# EAGLE board hardhat (EAGLE 5.10)
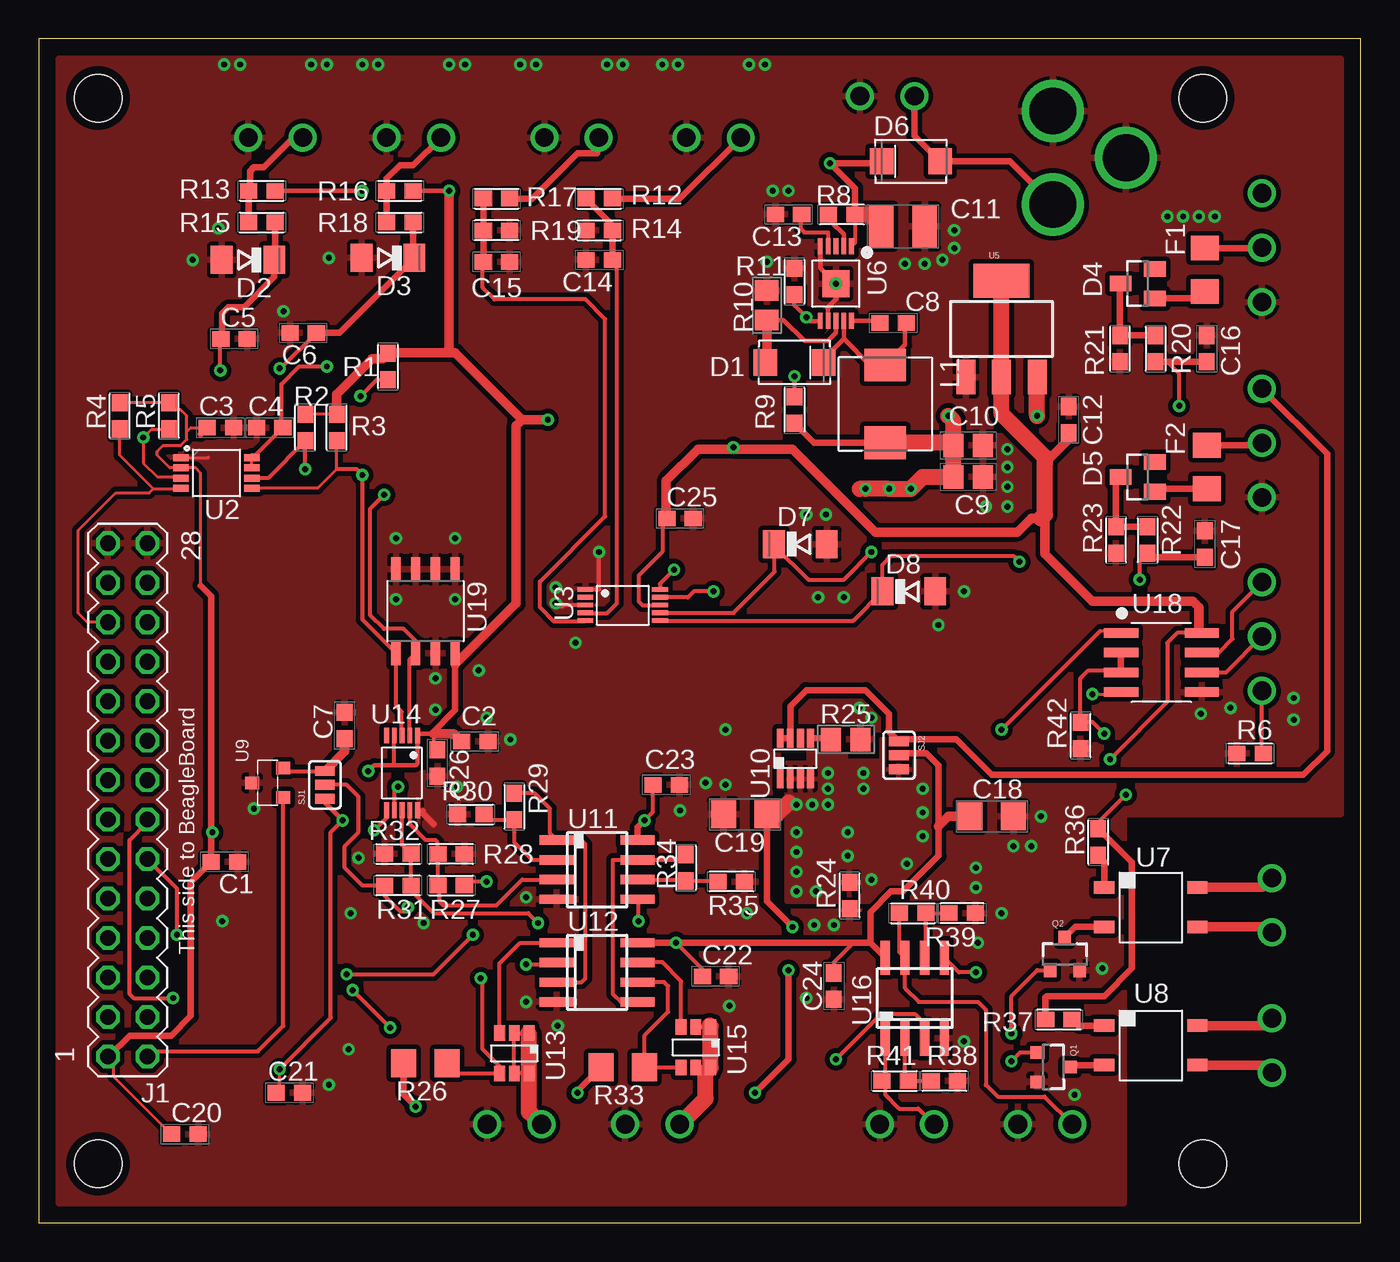
[diagram p0: board, top side]
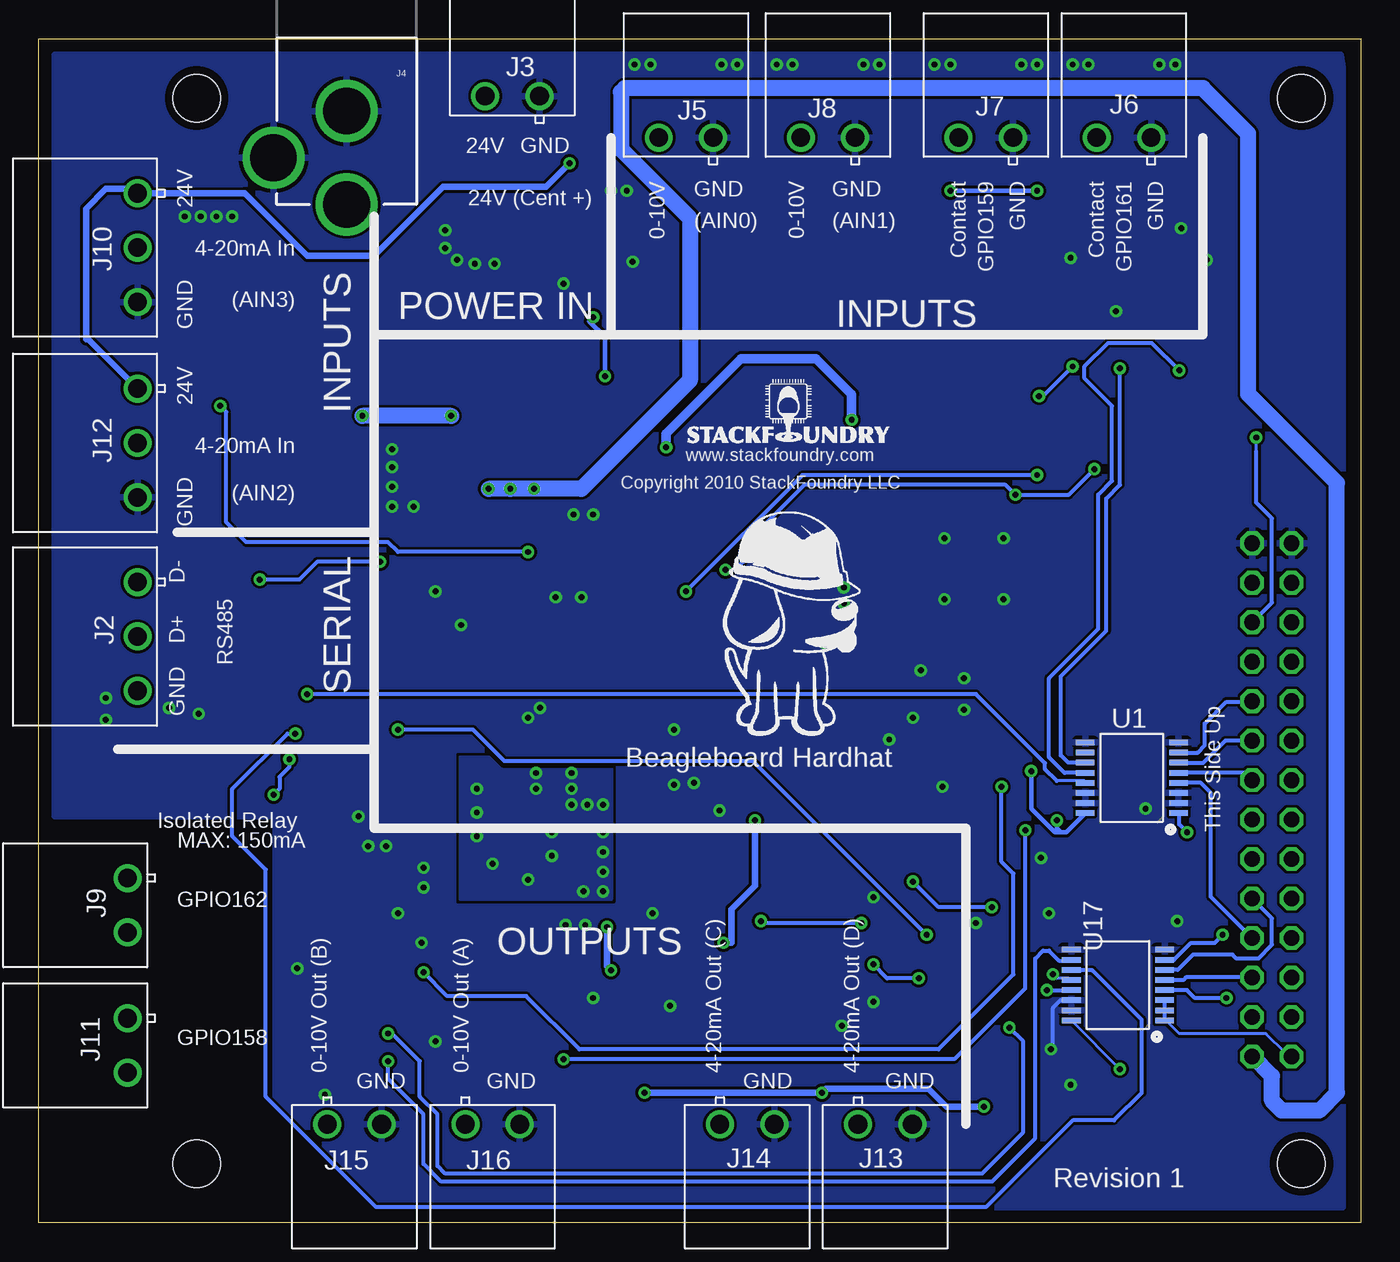
[diagram p1: board, bottom side, seen from below]

Size 85.09 x 76.2 mm. Coordinates in mm from the lower left corner, seen from the top.
Outline: 0,0 85.09,0 85.09,76.2 0,76.2 0,0
Copper layers (1*16): Top 0.0356mm / dielectric 1.5011mm / Bottom 0.0356mm
Design rules "PCB-Express_2layer *": minimum track width 8mil, minimum drill 15mil, track to track 7mil, track to pad 7mil, pad to pad 7mil, via to via 7mil, smd to smd 7mil, copper to edge 20mil, drill to drill 8mil, minimum pad ring 10mil, minimum via ring 8mil, stop-mask expansion 15mil, vias tented up to drill 15mil, thermal gap 10mil
Holes 3.05 mm at 3.81,3.81 3.81,72.39 74.93,72.39 74.93,3.81

## Footprints (pad centres in the part's own frame; a part is rotated, then mirrored left to right if it is on the bottom)
C0603 = smd 1.1 x 1: 1 -0.85,0; 2 0.85,0
C0805 = smd 1.3 x 1.5: 1 -0.95,0; 2 0.95,0
C1210 = smd 1.6 x 2.7: 1 -1.4,0; 2 1.4,0
C1206 = smd 1.6 x 1.8: 1 -1.4,0; 2 1.4,0
SMA = smd 1.524 x 1.676: A 1.88,0; C -1.88,0
SOD80C = smd 1.4 x 1.8: A 1.7,0; C -1.7,0
SOT23 = smd 1 x 1.4: 1 -0.95,-1.1; 2 0.95,-1.1; 3 0,1.1
R1206 = smd 1.6 x 1.8: 1 -1.4,0; 2 1.4,0
MA14-2M = drill 1.016 octagon: 1 -15.24,1.27; 2 -15.24,-1.27; 3 -12.7,1.27; 4 -12.7,-1.27; 5 -10.16,1.27; 6 -10.16,-1.27; 7 -7.62,1.27; 8 -7.62,-1.27; 9 -5.08,1.27; 10 -5.08,-1.27; 11 -2.54,1.27; 12 -2.54,-1.27; 13 0,1.27; 14 0,-1.27; 15 2.54,1.27; 16 2.54,-1.27; 17 5.08,1.27; 18 5.08,-1.27; 19 7.62,1.27; 20 7.62,-1.27; 21 10.16,1.27; 22 10.16,-1.27; 23 12.7,1.27; 24 12.7,-1.27; 25 15.24,1.27; 26 15.24,-1.27; 27 17.78,1.27; 28 17.78,-1.27
284512-3 = drill 1.2 round: 1 -1.75,0; 2 1.75,0; 3 5.25,0
284512-2 = drill 1.2 round: 1 -1.75,0; 2 1.75,0
POWER_JACK_PTH = drill 2.997 round: GND 0,7.7; GNDBREAK 4.7,10.7; PWR 0,13.7
ELL6 = smd 2.1 x 2.7: 1 -2.5,0; 2 2.5,0
SOT23-3 = smd 0.8 x 0.9: 1 -0.95,-1; 2 0.95,-1; 3 0,1.1
R0603 = smd 1.1 x 1: 1 -0.85,0; 2 0.85,0
R0805 = smd 1.3 x 1.5: 1 -0.95,0; 2 0.95,0
SJ_3 = smd 0.635 x 1.27: 1 -0.889,0; 2 0,0; 3 0.889,0
TSSOP16 = smd 0.35 x 1.2: 1 -1.95,-3; 2 -1.3,-3; 3 -0.65,-3; 4 0,-3; 5 0.65,-3; 6 1.3,-3; 7 1.95,-3; 8 2.6,-3; 9 2.6,3; 10 1.95,3; 11 1.3,3; 12 0.65,3; 13 0,3; 14 -0.65,3; 15 -1.3,3; 16 -1.95,3
TSSOP-8 = smd 1 x 0.45: 1 -2.275,0.975; 2 -2.275,0.325; 3 -2.275,-0.325; 4 -2.275,-0.975; 5 2.275,-0.975; 6 2.275,-0.325; 7 2.275,0.325; 8 2.275,0.975
MSOP10 = smd 0.3 x 1.016: 1 0,0; 2 0.5,0; 3 1.001,0; 4 1.501,0; 5 2.002,0; 6 2.002,4.801; 7 1.501,4.801; 8 1.001,4.801; 9 0.5,4.801; 10 0,4.801
SOT223 = smd 1.219 x 2.235: 1 -2.311,-3.099; 2 0,-3.099; 3 2.311,-3.099 | smd 3.6 x 2.2: 4 0,3.099
MSSOP-10 = smd 0.3 x 1.02: 1 -1,-2.4; 2 -0.5,-2.4; 3 0,-2.4; 4 0.5,-2.4; 5 1,-2.4; 6 1,2.4; 7 0.5,2.4; 8 0,2.4; 9 -0.5,2.4; 10 -1,2.4 | smd 1.73 x 1.73: P$1 0,0
SOP4 = smd 0.8 x 1.3: 1 -2.54,0; 2 0,0; 3 0,6; 4 -2.54,6
SOT23' = smd 0.8 x 0.9: 1 -0.95,-1; 2 0.95,-1; 3 0,1
TS8 = smd 0.44 x 1.22: 1 -1.3,0; 2 -0.65,0; 3 0,0; 4 0.65,0; 5 0.65,2.62; 6 0,2.62; 7 -0.65,2.62; 8 -1.3,2.62
SO08 = smd 0.6 x 2.2: 1 -1.905,-2.6; 2 -0.635,-2.6; 3 0.635,-2.6; 4 1.905,-2.6; 5 1.905,2.6; 6 0.635,2.6; 7 -0.635,2.6; 8 -1.905,2.6
SSOT-6 = smd 0.7 x 1: 1 -0.95,-1.3; 2 0,-1.3; 3 0.95,-1.3; 4 0.95,1.3; 5 0,1.3; 6 -0.95,1.3
SO-08 = smd 0.6 x 2.2: 1 -1.905,-2.6; 2 -0.635,-2.6; 3 0.635,-2.6; 4 1.905,-2.6; 5 1.905,2.6; 6 0.635,2.6; 7 -0.635,2.6; 8 -1.905,2.6
SO-08' = smd 0.6 x 1.55: 1 -1.905,-2.7; 2 -0.635,-2.7; 3 0.635,-2.7; 4 1.905,-2.7; 5 1.905,2.7; 6 0.635,2.7; 7 -0.635,2.7; 8 -1.905,2.7

## Placement (x,y rotation side)
C1  0.1uF  [C0603]  11.94,23.24 0 top
C2  0.1uF  [C0603]  28.07,30.99 0 top
C3  0.1uF  [C0603]  11.68,51.18 0 top
C4  0.1uF  [C0603]  14.86,51.18 180 top
C5  0.01uF  [C0603]  12.57,56.9 0 top
C6  0.01uF  [C0603]  17.02,57.28 180 top
C7  0.1uF  [C0603]  19.68,32 90 top
C8  0.1 uF  [C0603]  54.99,57.91 0 top
C9  4.7 uF  [C0805]  59.82,48.01 0 top
C10  4.7 uF  [C0805]  59.82,50.04 0 top
C11  10 uF, 50V  [C1210]  55.63,64.14 0 top
C12  1uF  [C0603]  66.29,51.69 270 top
C13  0.01 uF  [C0603]  48.26,64.9 180 top
C14  0.01uF  [C0603]  36.07,61.98 180 top
C15  0.01uF  [C0603]  29.46,61.85 0 top
C16  0.01uF  [C0603]  75.18,56.26 90 top
C17  0.01uF  [C0603]  75.06,43.69 90 top
C18  4.7uF  [C1206]  61.34,26.16 0 top
C19  4.7uF  [C1206]  45.47,26.29 180 top
C20  0.1uF  [C0603]  9.4,5.71 0 top
C21  0.1uF  [C0603]  16.13,8.38 0 top
C22  0.01uF  [C0603]  43.56,15.88 0 top
C23  0.01uF  [C0603]  40.39,28.19 0 top
C24  0.01uF  [C0603]  51.18,15.24 270 top
C25  0.01uF  [C0603]  41.27,45.34 0 top
C26  0.01uF  [C0603]  25.65,29.59 270 top
D1  B360A  [SMA]  48.64,55.37 180 top
D2  3.3V  [SOD80C]  13.46,61.98 180 top
D3  3.3V  [SOD80C]  22.48,62.1 180 top
D4  BAT754  [SOT23]  70.74,60.45 90 top
D5  BAT754  [SOT23]  70.74,48.01 90 top
D6  B360A  [SMA]  56.13,68.33 0 top
D7  3.3V  [SOD80C]  49.02,43.69 0 top
D8  3.3V  [SOD80C]  56.01,40.64 0 top
F1  [R1206]  75.06,61.34 90 top
F2  [R1206]  75.18,48.64 90 top
J1  [MA14-2M]  5.71,25.96 90 top
J2  284512-3  [284512-3]  78.74,39.5 270 bottom
J3  284512-2  [284512-2]  54.61,72.52 180 bottom
J4  POWER_JACKPTH  [POWER_JACK_PTH]  65.28,79.25 180 bottom
J5  284512-2  [284512-2]  43.43,69.85 180 bottom
J6  284512-2  [284512-2]  15.24,69.85 180 bottom
J7  284512-2  [284512-2]  24.13,69.85 180 bottom
J8  284512-2  [284512-2]  34.29,69.85 180 bottom
J9  284512-2  [284512-2]  79.38,20.45 270 bottom
J10  284512-3  [284512-3]  78.74,64.52 270 bottom
J11  284512-2  [284512-2]  79.38,11.43 270 bottom
J12  284512-3  [284512-3]  78.74,51.94 270 bottom
J13  284512-2  [284512-2]  30.61,6.35 0 bottom
J14  284512-2  [284512-2]  39.5,6.35 0 bottom
J15  284512-2  [284512-2]  64.77,6.35 0 bottom
J16  284512-2  [284512-2]  55.88,6.35 0 bottom
L1  22 uH  [ELL6]  54.48,52.7 270 top
LOGO1  SFLOGO  [SFLOGO]  43.31,50.19 0 bottom
Q1  2n7002  [SOT23-3]  65.28,10.03 270 top
Q2  2n7002  [SOT23-3]  66.04,17.27 0 top
R1  200k  [R0603]  22.48,55.12 90 top
R2  10k  [R0603]  17.14,51.18 90 top
R3  10k  [R0603]  19.18,51.18 90 top
R4  10k  [R0603]  5.21,51.94 90 top
R5  10k  [R0603]  8.38,51.94 90 top
R6  100  [R0603]  77.98,30.23 0 top
R8  110k  [R0603]  51.69,64.9 180 top
R9  9.76k  [R0603]  48.64,52.32 270 top
R10  0.2  [R0805]  46.86,59.05 270 top
R11  10k  [R0603]  48.64,60.58 270 top
R12  40.2k  [R0603]  36.07,65.91 0 top
R13  10k  [R0603]  14.35,66.42 0 top
R14  10k  [R0603]  36.07,63.88 0 top
R15  10k  [R0603]  14.35,64.39 0 top
R16  10k  [R0603]  23.24,66.42 0 top
R17  40.2k  [R0603]  29.46,65.91 0 top
R18  10k  [R0603]  23.24,64.39 0 top
R19  10k  [R0603]  29.46,63.88 180 top
R20  47k  [R0603]  71.88,56.26 270 top
R21  100  [R0603]  69.6,56.26 90 top
R22  47k  [R0603]  71.37,43.94 270 top
R23  100  [R0603]  69.34,43.94 90 top
R24  10k  [R0603]  52.2,21.08 90 top
R25  1.91M  [R0805]  51.94,31.11 180 top
R26  300 0.1%  [R1206]  24.89,10.29 180 top
R27  6.65k  [R0603]  26.54,21.72 0 top
R28  10k  [R0603]  26.54,23.75 180 top
R29  54.9k  [R0603]  30.61,26.8 270 top
R30  10k  [R0603]  27.81,26.29 0 top
R31  6.65k  [R0603]  23.11,21.72 180 top
R32  10k  [R0603]  23.11,23.75 0 top
R33  300 0.1%  [R1206]  37.59,10.03 180 top
R34  54.9k  [R0603]  41.66,22.86 270 top
R35  10k  [R0603]  44.58,21.97 180 top
R36  220  [R0603]  68.2,24.51 90 top
R37  220  [R0603]  65.66,13.08 180 top
R38  10k  [R0603]  58.29,9.14 180 top
R39  10k  [R0603]  59.44,19.94 180 top
R40  40.2k  [R0603]  56.26,19.94 0 top
R41  40.2k  [R0603]  55.12,9.14 0 top
R42  10k  [R0603]  67.06,31.37 90 top
SJ1  [SJ_3]  18.41,28.19 90 top
SJ2  [SJ_3]  55.37,30.1 270 top
U1  SN74AVC4T245PW  [TSSOP16]  14.73,28.32 90 bottom
U2  GTL2002TSSOP8  [TSSOP-8]  11.43,48.26 0 top
U3  ADS1015  [MSOP10]  35.18,40.77 270 top
U5  [SOT223]  61.98,57.53 0 top
U6  LM25011  [MSSOP-10]  51.31,60.45 180 top
U7  TLP176D  [SOP4]  68.58,19.05 270 top
U8  TLP176D  [SOP4]  68.58,10.16 270 top
U9  REF3333  [SOT23']  14.73,28.32 90 top
U10  LT3082TS8  [TS8]  49.02,28.57 0 top
U11  LT1678  [SO08]  35.94,22.73 270 top
U12  OPA2141  [SO08]  35.94,16.13 270 top
U13  FDC5614P  [SSOT-6]  30.61,10.92 180 top
U14  MCP4728  [MSOP10]  24.38,31.37 180 top
U15  FDC5614P  [SSOT-6]  42.29,11.3 180 top
U16  LT1678  [SO08]  56.39,14.48 0 top
U17  SN74AVC4T245PW  [TSSOP16]  15.62,14.99 90 bottom
U18  SN65HVD11SO-08  [SO-08]  72.26,36.07 270 top
U19  24C01SN  [SO-08']  24.89,39.37 180 top
U$1  BEAGLE_HARDHAT  [BEAGLE_HARDHAT]  44.83,31.37 0 bottom

## Library data of the parts
C1-C26 F1 F2 L1 R1-R6 R8-R42 = rcl
D1-D8 = diode
J1 = con-lstb
J2 J3 J5-J16 = con-tyco
J4 Q1 Q2 SJ1 SJ2 U5 = SparkFun
LOGO1 U$1 = logos
U1 U3 U17 U18 = texas
U2 = nxp
U6 = national-semiconductor
U7 U8 = toshiba
U9 = analog-devices
U10 = linear-technology
U11 U12 U16 = linear
U13 U15 = fairchild-semic
U14 U19 = microchip

## Nets
10V_1: C14.1 R12.1 R14.2 U3.4
10V_2: C15.1 R17.1 R19.2 U3.5
20MA_1: C16.1 D7.C R20.2 U3.7
20MA_2: C17.1 D8.C R22.2 U3.6
+1V8: C1.1 C3.1 C20.1 J1.1 R4.2 R5.2 U1.1 U2.2 U17.1 U17.2 U17.3
+3V3: C2.1 C12.2 C21.1 C25.1 C26.1 R1.2 R2.2 R3.2 R13.2 R16.2 R36.2 R37.2 SJ1.1 U1.16 U3.8 U5.2 U5.4 U14.1 U14.4 U17.16 U18.8 U19.8
+5V: C9.1 C10.1 J1.2 L1.2 R9.2 U5.3 U9.1
+18V: C19.1 R24.2 R26.2 R33.2 SJ2.3 U10.2 U10.3 U10.4
+24V: C11.1 D6.C J10.1 J12.1 R8.1 SJ2.1 U6.1 U10.7 U10.8
BB_!RESET: J1.26
BB_GPIO_133: J1.15
BB_GPIO_136: J1.9
BB_GPIO_137: J1.7
BB_GPIO_138: J1.5
BB_GPIO_139: J1.3
BB_GPIO_143/U2RX: J1.8 U1.4
BB_GPIO_144/U2CTS: J1.4
BB_GPIO_145/U2RTS: J1.10 U17.6
BB_GPIO_146/U2TX: J1.6 U17.5
BB_GPIO_156: J1.20 U1.7
BB_GPIO_158: J1.12 U17.7
BB_GPIO_159: J1.18 U1.6
BB_GPIO_161: J1.16 U1.5
BB_GPIO_162: J1.14 U17.4
BB_SCL: J1.24 R5.1 U2.3
BB_SDA: J1.23 R4.1 U2.4
BB_SPI3_!CS0: J1.11
BB_SPI3_!CS1: J1.13
BB_SPI3_CLK: J1.21
BB_SPI3_MISO: J1.17
BB_SPI3_MOSI: J1.19
CONT1: C5.1 D2.C R15.2 U1.12
CONT2: C6.1 D3.C R18.2 U1.11
COUT1: Q2.1 U17.13
COUT2: Q1.1 U17.10
DACRDY: U14.5
GND: C1.2 C2.2 C3.2 C4.2 C5.2 C6.2 C7.2 C9.2 C10.2 C11.2 C12.1 C13.2 C14.2 C15.2 C16.2 C17.2 C18.2 C19.2 C20.2 C21.2 C22.2 C23.2 C24.2 C25.2 C26.2 D2.A D3.A D7.A D8.A J1.27 J1.28 J3.1 J4.GND J4.GNDBREAK J5.1 J6.1 J7.1 J8.1 J10.3 J12.3 J13.2 J14.2 J15.2 J16.2 Q1.2 Q2.2 R6.1 R10.1 R11.1 R14.1 R19.1 R21.1 R23.1 R24.1 R25.1 R28.1 R30.1 R32.1 R35.1 R38.1 R39.1 R42.1 U1.2 U1.3 U1.8 U1.9 U1.14 U1.15 U2.1 U3.1 U3.3 U5.1 U6.5 U6.7 U6.P$1 U9.3 U11.4 U12.4 U14.10 U16.4 U17.8 U17.9 U17.14 U17.15 U18.5 U19.1 U19.2 U19.3 U19.4 U19.7
N$1: J9.2 U7.3
N$3: J6.2 R13.1 R15.1
N$4: J9.1 U7.4
N$5: J11.2 U8.3
N$6: J7.2 R16.1 R18.1
N$7: J11.1 U8.4
N$8: J2.1 U18.7
N$9: J5.2 R12.2
N$10: J8.2 R17.2
N$11: D6.A J3.2 J4.PWR
N$12: J2.3 R6.2
N$16: R27.1 R28.2 U11.3 U14.9
N$17: C4.1 R1.1 U2.7 U2.8
N$18: R31.1 R32.2 U11.5 U14.8
N$19: R29.2 R30.2 U11.2
N$20: R29.1 U11.1 U12.3
N$21: R34.1 U11.7 U12.5
N$22: R34.2 R35.2 U11.6
N$23: R25.2 U10.5
N$24: U12.1 U13.3
N$25: U12.7 U15.3
N$26: R33.1 U12.6 U15.4
N$27: R26.1 U12.2 U13.4
N$28: J13.1 U13.1 U13.2 U13.5 U13.6
N$29: J14.1 U15.1 U15.2 U15.5 U15.6
N$31: D5.1 F2.1
N$32: D5.3 R22.1 R23.2
N$34: D4.3 R20.1 R21.2
N$35: F2.2 J12.2
N$37: R36.1 U7.1
N$38: D4.1 F1.1
N$39: F1.2 J10.2
N$40: R37.1 U8.1
N$41: Q2.3 U7.2
N$42: Q1.3 U8.2
N$43: J15.1 R40.1 U16.7
N$44: J16.1 R41.1 U16.1
N$45: U14.7 U16.5
N$46: U14.6 U16.3
N$47: R39.2 R40.2 U16.6
N$48: R38.2 R41.2 U16.2
N$51: J2.2 U18.6
N$131: D1.A R10.2 U6.8
N$135: C8.2 D1.C L1.1 U6.9
N$158: R9.1 R11.2 U6.6
N$159: C8.1 U6.10
N$160: C13.1 U6.4
N$173: R8.2 U6.2
RX: U17.12 U18.1
SCL: R2.1 U2.6 U3.10 U14.2 U19.6
SDA: R3.1 U2.5 U3.9 U14.3 U19.5
TX: U1.13 U18.4
U2RTS: R42.2 U17.11 U18.2 U18.3
VOFFSET: R27.2 R31.2 SJ1.2
VOPSPLY: C18.1 C22.1 C23.1 C24.1 SJ2.2 U11.8 U12.8 U16.8
VREF_33: C7.1 SJ1.3 U9.2

## Tracks (layer width: path | path; a pad name or v marks a point on that pad's centre or on a via)
10V_1
  Top 0.254: U3.4 35.2,39.24 36.58,39.24 37.21,39.88 37.21,61.68 C14.1
  Top 0.406: C14.1 R14.2 36.92,64.21 R12.1
10V_2
  Top 0.254: C15.1 28.57,61.81 28.57,60.2 29.34,59.44 35.18,59.44 36.45,58.17 36.45,45.47 32.26,41.27 32.26,39.62 33.15,38.73 35.15,38.73 U3.5
  Top 0.406: R17.1 R19.2 C15.1
20MA_1  (via drill 0.38)
  Top 0.254: U3.7 44.73,39.27 47.37,41.91 47.37,43.56 | D7.C 47.37,43.64 47.37,43.56 | 47.37,43.56 49.53,41.4 51.82,41.4 v53.59,43.18 | v73.41,52.58 73.41,54.65 72.64,55.41
  Top 0.406: R20.2 72.64,55.41 C16.1
  Bottom 0.254: v53.59,43.18 61.98,43.18 62.61,43.81 71.75,43.81 73.03,45.09 73.03,52.2 v73.41,52.58
20MA_2  (via drill 0.38)
  Top 0.254: U3.6 52.43,38.77 D8.C 54.31,42.37 54.86,42.93 62.74,42.93 v63.12,42.55 | v70.87,41.4 70.87,42.58 R22.2
  Top 0.406: C17.1 71.37,42.84 R22.2
  Bottom 0.254: v63.12,42.55 67.18,42.55 68.33,41.4 v70.87,41.4
+1V8  (via drill 0.38)
  Top 0.203: R4.2 R5.2 8.85,52.32 9.14,52.32 9.53,51.94 9.53,50.93 | 9.53,50.93 9.53,50.42 9.14,50.04 8,50.04 7.62,49.66 7.62,49.4 8.44,48.59 U2.2 10.09,48.59 10.41,48.26 10.41,41.02 | C3.1 9.78,51.18 9.53,50.93 | C20.1 8.38,5.84 4.83,9.4 4.83,10.92 J1.1 | 11.09,25.65 v11.18,25.15
  Top 0.406: J1.1 4.5,10.72 5.84,12.06 8.51,12.06 9.78,13.34 9.78,21.93 C1.1 11.09,25.65 11.09,40.35 10.41,41.02 | C3.1 10.41,50.76
  Bottom 0.203: 11.68,26.42 U1.1 | U17.1 12.45,12.95 11.68,12.19 6.1,12.19 4.83,10.92 4.57,10.92 J1.1
  Bottom 0.254: U17.1 U17.2 U17.3 | 11.68,26.42 11.68,25.65 v11.18,25.15
+3V3  (via drill 0.38)
  Top 0.203: R3.2 R2.2 | v15.49,9.91 15.49,8.89 C21.1 | 18.03,27.18 18.29,27.43 SJ1.1
  Top 0.254: R36.2 68.2,25.78 v69.98,27.56 | U3.8 39.96,39.75 38.86,39.75 38.61,40.01 38.61,41.66 40.13,43.18 40.13,45.21 40.26,45.34 C25.1 | 75.44,37.97 73.28,37.97 72.64,37.34 72.64,33.53 v68.96,29.84 | v15.49,9.91 18.8,13.21 18.8,25.15 v19.56,25.91 | U14.4 22.86,31.37 22.86,29.46 | C26.1 25.4,30.44 25.4,31.5 25.27,31.5
  Top 0.305: v20.83,66.42 R13.2 | v26.42,66.42 R16.2 | 25.27,31.5 24.51,31.5 U14.1 24.38,29.59 24.26,29.46 22.86,29.46 21.59,29.46 v21.21,29.08 | SJ1.1 18.41,27.05 v19.56,25.91
  Top 0.406: R37.2 64.81,14.52 64.9,14.61 68.58,14.61 70.36,16.38 70.36,23.2 R36.2 | U19.8 26.8,35.94 26.8,33.02 25.27,31.5
  Top 0.61: 64.77,45.59 64.77,43.05 67.82,40.01 74.3,40.01 74.68,39.62 74.68,38.16 U18.8 75.44,37.97 | 64.52,45.34 63.88,45.34 62.99,44.45 53.85,44.45 48.51,49.78 44.83,49.78 | v44.7,49.91 44.83,49.78 | 31.11,51.69 v32.77,51.69 | 31.11,51.69 26.8,56.01 26.16,56.01 | 26.16,56.01 22.52,56.01 R1.2 22.14,55.63 21.46,55.63 19.18,53.34 R3.2 | v26.42,66.42 26.42,56.26 26.16,56.01 | C12.2 66.29,50.42 64.77,48.9 | 26.8,35.94 30.73,39.88 30.73,51.31 31.11,51.69 | 25.4,31.5 26.71,31.5 C2.1 | 44.83,49.78 42.42,49.78 40.39,47.75 40.39,45.38 C25.1
  Top 1.016: U5.4 U5.2 61.98,52.07 64.77,49.28 64.77,48.9 64.77,45.59 64.52,45.34
  Bottom 0.203: v15.49,9.91 18.54,12.95 U17.16
  Bottom 0.254: v69.98,27.56 69.6,27.94 69.6,28.7 68.96,29.34 v68.96,29.84
  Bottom 0.305: v26.42,66.42 v20.83,66.42 | v21.21,29.08 21.21,26.67 19.68,25.15 19.3,25.15 | 19.3,25.15 18.96,25.15 U1.16 | v19.56,25.91 19.56,25.4 19.3,25.15
  Bottom 0.61: v44.7,49.91 44.7,50.8 39.88,55.63 35.05,55.63 32.77,53.34 v32.77,51.69
+5V  (via drill 0.38)
  Top 0.254: U9.1 15.73,12.68 14.1,11.05 7.32,11.05 J1.2
  Top 0.406: R9.2 49.91,50.2 L1.2
  Top 1.016: L1.2 58.7,50.2 C10.1 | C10.1 C9.1 56.9,48.01 v56.13,47.24 v54.74,47.24 v53.21,47.24 52.83,47.24 | C10.1 58.87,51.62 v58.55,51.94 | v64.26,51.94 64.26,54.41 U5.3
  Bottom 1.016: v58.55,51.94 v64.26,51.94 | v56.13,47.24 v54.74,47.24 50.16,47.24 43.18,54.23 43.18,64.64 47.62,69.09 47.62,72.77 47.37,73.03 10.16,73.03 7.24,70.1 7.24,53.34 1.52,47.62 1.52,8.38 2.67,7.24 5.08,7.24 5.71,7.87 5.71,9.45 J1.2
+18V  (via drill 0.38)
  Top 0.406: R26.2 23.49,8.26 v24.26,7.49 | v34.67,8.38 34.67,8.51 R33.2 | C19.1 46.87,20.7 v48.51,19.05 | v48.26,16.26 48.26,10.54 v46.1,8.38
  Top 1.016: C19.1 47.5,26.29 48.26,27.05
  Bottom 0.406: v24.26,7.49 26.67,7.49 27.81,8.64 34.42,8.64 v34.67,8.38 v46.1,8.38 | v48.51,19.05 48.51,16.51 v48.26,16.26
  other vias: 50.8,27.94 53.09,27.94 50.8,26.92 52.07,25.15 48.77,26.92 49.78,26.92 50.8,28.96 53.09,28.96 56.9,27.94 56.9,26.42 56.9,24.89 48.77,21.34 50.04,21.34 48.77,22.61 55.88,23.11 53.59,22.1 52.07,23.62 48.77,23.88 48.77,25.15
  pour Top: 49.53,33.02 49.53,29.59 48.13,29.59 48.13,20.7 57.78,20.7 57.78,28.45 56.77,31.11 54.23,31.11 54.23,29.72 51.94,29.72 51.94,33.02
  pour Bottom (isolate 0.305): 48.26,28.96 48.26,20.83 57.91,20.83 57.91,29.97 48.26,29.97
+24V  (via drill 0.38)
  Top 0.254: 52.34,62.88 52.54,63.08 R8.1
  Top 0.305: 52.34,62.88 U6.1
  Top 0.406: U10.8 U10.7 48.37,33.26 49.4,34.29 53.21,34.29 54.74,32.77 54.74,31.62 55.24,31.11 | 55.24,31.11 SJ2.1 | 55.24,31.11 59.05,31.11 61.34,28.83 81.41,28.83 82.93,30.35 82.93,49.5 J12.1 | D6.C 54.13,68.2 v50.93,68.2 52.54,66.59 R8.1
  Top 1.016: R8.1 53.46,64.9 C11.1
  Bottom 0.406: J12.1 81.92,56.87 82.04,56.87 82.04,65.28 80.77,66.55 79.02,66.55 J10.1 71.85,66.27 67.82,62.23 63.5,62.23 59.05,66.67 52.45,66.67 v50.93,68.2
BB_GPIO_143/U2RX
  Bottom 0.203: J1.8 7.11,18.34
  Bottom 0.254: U1.4 10.29,28.32 9.65,27.69 9.65,21.01 J1.8
BB_GPIO_145/U2RTS
  Bottom 0.254: U17.6 11.78,16.29 10.79,17.27 8.26,17.27 8,17.02 6.6,17.02 5.71,17.91 5.71,19.61 J1.10
BB_GPIO_146/U2TX
  Bottom 0.254: J1.6 11.25,15.8 11.43,15.62 12.61,15.62 U17.5
BB_GPIO_156
  Bottom 0.254: U1.7 10.5,30.27 10.03,30.73 10.03,32.13 8.64,33.53 7.04,33.53 J1.20
BB_GPIO_158  (via drill 0.38)
  Top 0.254: v8.89,18.54 8.89,21.51 J1.12
  Bottom 0.254: U17.7 12.02,16.94 10.92,18.03 9.4,18.03 v8.89,18.54
BB_GPIO_159
  Bottom 0.254: J1.18 8.71,31.04 10.16,29.59 11.7,29.59 U1.6
BB_GPIO_161
  Bottom 0.254: U1.5 7.46,28.97 J1.16
BB_GPIO_162  (via drill 0.38)
  Top 0.254: J1.14 6.99,25.78 5.84,24.64 5.84,14.73 6.1,14.48 v8.64,14.48
  Bottom 0.254: v8.64,14.48 10.67,14.48 11.18,14.99 U17.4
BB_SCL  (via drill 0.38)
  Top 0.203: U2.3 9.08,48.01 7.62,48.01 6.73,48.9 v6.73,50.55 7.28,51.09 R5.1
  Bottom 0.203: 6.73,49.66 v6.73,50.55
  Bottom 0.254: J1.24 5.71,39.93 5.71,45.34 6.73,46.35 6.73,49.66
BB_SDA
  Top 0.203: R4.1 5.21,49.4 7.37,47.24 | 7.37,47.24 9.11,47.24 U2.4 | J1.23 3.12,38.66 2.54,39.24 2.54,44.58 4.95,46.99 7.11,46.99 7.37,47.24
CONT1  (via drill 0.38)
  Top 0.254: v11.68,54.86 11.68,56.86 C5.1
  Top 0.406: R15.2 15.2,62.02 D2.C 15.16,60.88 13.21,58.93 12.19,58.93 11.81,58.55 11.81,56.98 C5.1
  Bottom 0.254: U1.12 19.07,28.97 20.07,29.97 20.07,35.05 16.89,38.23 16.89,46.86 16,47.75 16,52.58 17.78,54.36 17.78,55.12 16.26,56.64 13.46,56.64 v11.68,54.86
CONT2  (via drill 0.38)
  Top 0.254: v15.49,54.99 15.58,54.99 C6.1
  Top 0.406: R18.2 24.09,62.19 D3.C 19.35,57.28 C6.1
  Bottom 0.254: U1.11 18.83,29.62 19.3,30.1 19.3,35.18 16.38,38.1 16.38,46.61 15.49,47.5 v15.49,54.99
COUT1  (via drill 0.38)
  Top 0.254: Q2.1 64.28,16.27 62.61,14.61 v62.61,12.19 | v22.61,12.57 v20.19,14.99
  Bottom 0.254: v62.61,12.19 62.36,12.19 60.58,10.41 60.58,8.13 59.44,6.99 59.44,3.68 58.93,3.17 24.38,3.17 21.72,5.84 21.72,11.68 v22.61,12.57 | v20.19,14.99 U17.13
COUT2  (via drill 0.38)
  Top 0.254: Q1.1 63.18,10.98 v62.61,10.41
  Bottom 0.254: v62.61,10.41 62.61,9.27 60.33,6.99 60.33,3.81 59.18,2.67 23.75,2.67 20.95,5.46 20.95,17.02 20.45,17.53 20.07,17.53 19.43,16.89 18.67,16.89 U17.10
GND  (via drill 0.38)
  Top 0.203: U2.1 10.88,49.23 10.92,49.28
  Top 0.254: U3.3 33.39,39.77 v33.27,39.88 | U14.10 24.77,26.57 24.77,26.29 | U3.1 36.07,40.77 v36.07,43.18
  Top 0.305: U6.5 50.31,61.45 U6.P$1 51.31,59.44 50.8,58.93 U6.7
  Top 0.406: 24.49,26.57 24.77,26.29 25.4,25.65 | 33.66,39.75 33.67,39.77
  Bottom 0.254: U17.14 19.32,14.34 19.81,13.84 19.81,11.3 v19.94,11.18
  other vias: 11.81,19.43 52.83,33.15 53.59,32.51 62.36,49.78 62.36,48.64 62.36,47.37 62.36,46.1 60.96,46.1 51.31,60.45 57.02,61.72 58.93,63.88 58.93,62.74 58.17,61.98 55.75,61.72 47.24,66.42 48.26,66.42 57.91,38.48 68.45,16.38 80.77,32.38 80.77,33.78 76.71,33.15 31.37,20.95 31.37,14.22 13.84,26.67 59.56,11.68 60.33,22.86 51.18,19.18 49.91,19.18 60.33,21.59 61.98,19.94 60.45,18.03 63.88,24.26 33.27,40.89 50.67,45.59 51.82,40.26 50.16,40.26 59.56,40.64 22.99,40.13 22.99,44.07 20.57,23.5 20.07,19.94 24.77,19.3 26.92,28.07 30.35,31.11 28.83,32.51 41.27,26.54 42.93,28.32 34.54,37.34 45.59,19.94 44.45,13.97 33.4,12.7 18.67,8.89 49.4,14.48 62.74,24.26 64.52,26.16 74.8,32.77 18.67,62.1 15.75,58.67 9.91,61.98 11.56,64.01 66.67,8.26 46.86,61.85 72.64,64.77 73.66,64.77 74.68,64.77 75.69,64.77 46.74,74.55 45.72,74.55 40.13,74.55 37.59,74.55 36.58,74.55 32,74.55 30.99,74.55 41.15,74.55 27.43,74.55 26.42,74.55 20.83,74.55 21.84,74.55 18.54,74.55 17.53,74.55 11.94,74.55 12.95,74.55 26.8,44.07 26.8,40.13 25.53,35.05 25.53,33.02 28.32,35.56 44.2,28.19 44.2,31.75 49.4,45.59
  pour Top (isolate 0.305, rank 2): 1.27,74.93 1.27,1.27 69.85,1.27 69.85,26.29 83.82,26.29 83.82,74.93
  pour Bottom (rank 2): 1.27,75.18 84.07,75.18 84.07,26.16 69.85,26.16 69.85,1.02 1.14,1.02 1.14,74.3
N$1
  Top 0.61: U7.3 79.02,19.05 J9.2
N$3
  Top 0.406: J6.2 16.38,69.85 14.48,67.94 13.84,67.94 13.59,67.69 13.59,66.51 R13.1 R15.1
N$4
  Top 0.61: U7.4 78.77,21.59 J9.1
N$5
  Top 0.61: U8.3 78.89,10.16 J11.2
N$6
  Top 0.406: R18.1 R16.1 22.39,67.22 23.24,68.07 24.1,68.07 J7.2
N$7
  Top 0.61: U8.4 78.89,12.7 J11.1
N$8
  Top 0.254: U18.7 75.95,36.7 76.83,37.59 76.83,39.34 J2.1
N$9
  Top 0.406: R12.2 41.25,65.91 J5.2
N$10
  Top 0.406: R17.2 31.75,65.91 34.67,68.83 35.94,68.83 35.94,69.75 J8.2
N$11
  Top 0.406: J3.2 56.36,69.98 D6.A 62.5,68.33 J4.PWR
N$12
  Top 0.254: J2.3 78.74,30.31 R6.2
N$16
  Top 0.254: U11.3 31.11,22.1 29.46,20.45 26.04,20.45 25.78,20.7 25.78,21.63 R27.1 R28.2 25.65,23.79 25.65,24.51 25.53,24.64 24.89,24.64 23.88,25.65 U14.9
N$17  (via drill 0.38)
  Top 0.203: U2.7 U2.8 13.71,49.43
  Top 0.254: R1.1 21.76,54.27 v20.7,53.21 | v18.54,55.12 16.76,55.12 15.62,53.98 15.62,51.35 C4.1 13.96,49.43 13.71,49.43
  Bottom 0.254: v20.7,53.21 20.45,53.21 v18.54,55.12
N$18  (via drill 0.38)
  Top 0.254: v32.13,19.3 31.5,19.94 25.4,19.94 23.96,21.38 R31.1 R32.2 23.38,24.33 U14.8 | v38.61,19.43 38.61,20.76 U11.5
  Bottom 0.254: v32.13,19.3 38.48,19.3 v38.61,19.43
N$19
  Top 0.254: U11.2 31.75,23.37 30.61,24.51 R29.2 29,25.95 R30.2
N$20
  Top 0.254: U12.3 34.92,15.49 35.18,15.75 35.18,24.38 34.92,24.64 U11.1 32.89,25.09 32.89,26.67 31.92,27.65 R29.1
N$21
  Top 0.254: U12.5 37.47,14.22 36.96,14.73 36.96,23.37 U11.7 41.31,23.37 R34.1
N$22
  Top 0.254: U11.6 41.57,22.1 R34.2 43.69,22.01 R35.2
N$23
  Top 0.203: 50.91,31.2 R25.2
  Top 0.406: U10.5 50.91,31.2
N$24
  Top 0.254: U13.3 29.66,16.7 30.99,18.03 U12.1
N$25
  Top 0.254: U15.3 41.34,15.55 40.13,16.76 U12.7
N$26
  Top 0.254: U15.4 41.31,10.03 R33.1 38.99,12.07 40.51,13.59 40.51,15.24 40.26,15.49 U12.6
N$27  (via drill 0.38)
  Top 0.254: R26.1 26.96,9.62 U13.4 29.66,10.09 28.57,11.18 28.57,15.62 v28.45,15.75 | v31.37,16.64 33.21,16.64 U12.2
  Bottom 0.254: v28.45,15.75 30.48,15.75 v31.37,16.64
N$28
  Top 0.254: U13.6 U13.5 U13.2 U13.1
  Top 1.016: J13.1 31.56,7.15 U13.6 31.56,12.13 31.5,12.19
N$29
  Top 0.254: U15.5 U15.6 U15.1 U15.2
  Top 1.016: J14.1 41.27,6.35 42.93,8 42.93,9.69 U15.6 43.24,12.64 43.18,12.7
N$31
  Top 0.406: F2.1 71.84,47.24 D5.1
N$32
  Top 0.406: D5.3 69.34,48.01 R23.2 R22.1
N$34
  Top 0.406: D4.3 69.6,60.45 R21.2 R20.1
N$35
  Top 0.406: 75.18,50.01 F2.2 78.59,50.04 J12.2
N$37
  Top 0.406: U7.1 68.58,23.28 R36.1
N$38
  Top 0.406: D4.1 75.06,59.5 F1.1
N$39
  Top 0.406: F1.2 78.72,62.74 J10.2
N$40
  Top 0.406: U8.1 66.89,12.7 R37.1
N$41
  Top 0.406: U7.2 66.72,19.05 Q2.3
N$42
  Top 0.406: U8.2 66.5,10.16 Q1.3
N$43
  Top 0.254: R40.1 55.41,17.42 U16.7 55.75,15.11 56.64,14.22 60.45,14.22 60.96,13.72 60.96,8.89 61.72,8.13 64.74,8.13 J15.1
N$44
  Top 0.254: 54.48,9.36 U16.1 | 54.48,9.36 R41.1 | 54.48,9.36 54.48,8.26 55.37,7.37 56.61,7.37 J16.1
N$45  (via drill 0.38)
  Top 0.254: U14.7 22.88,27.84 v23.11,28.07 | v60.33,16.13 59.24,16.13 U16.5
  Bottom 0.254: v23.11,28.07 23.11,23.24 22.35,22.48 22.35,16 27.18,11.18 50.29,11.18 53.72,14.61 58.8,14.61 v60.33,16.13
N$46  (via drill 0.38)
  Top 0.254: U14.6 22.38,26.07 v21.59,25.27 | U16.3 57.02,12.83 56.39,13.46 54.23,13.46 v51.31,10.54
  Bottom 0.254: v21.59,25.27 21.59,15.11 26.16,10.54 v51.31,10.54
N$47
  Top 0.254: U16.6 57.11,17.17 R40.2 R39.2
N$48
  Top 0.254: U16.2 55.75,9.36 R41.2 R38.2
N$51
  Top 0.254: U18.6 76.43,35.43 J2.2
N$131
  Top 0.305: R10.2 47.94,58.1 49.28,56.77 50.8,56.77 51.31,57.28 U6.8
  Top 0.61: R10.2 46.86,55.47 D1.A
N$135
  Top 0.305: D1.C 50.52,55.6 51.82,56.9 | 51.82,56.9 U6.9 | 51.82,56.9 53.51,55.2 L1.1 54.48,55.24 55.75,56.52 55.75,57.82 C8.2
N$158  (via drill 0.38)
  Top 0.254: R11.2 48.64,59.05 v49.4,58.29
  Top 0.305: v49.4,58.29 49.66,58.04 50.3,58.04 U6.6 | R9.1 v48.64,54.48
  Bottom 0.305: v48.64,54.48 48.64,57.02 49.66,58.04 v49.4,58.29
N$159
  Top 0.305: U6.10 54,58.05 C8.1
N$160
  Top 0.254: U6.4 50.8,63.75 49.28,63.75 49.02,64.01 49.02,64.81 C13.1
  Top 0.305: C13.1 49.53,64.9 | U6.4
N$173
  Top 0.305: R8.2 51.04,64.4 51.82,63.63 U6.2
RX  (via drill 0.38)
  Top 0.203: 68.33,38.1 69.6,38.1 U18.1
  Top 0.254: v61.98,31.75 68.33,38.1 | v19.81,16 25.4,16 v27.94,18.54
  Bottom 0.203: v19.81,16 19.56,15.75 18.8,15.75 U17.12
  Bottom 0.254: v61.98,31.75 57.15,31.75 55.12,29.72 39.12,29.72 v27.94,18.54
SCL  (via drill 0.38)
  Top 0.254: U14.2 23.88,31.61 23.88,31.62 23.88,36.29 U19.6 24.26,37.47 23.5,38.23 22.23,38.23 21.34,39.12 21.34,45.97 v22.23,46.86 | U2.6 14.75,47.94 R2.1 v17.14,48.51 | U3.10 39.98,41.12 v40.89,42.04
  Bottom 0.254: v17.14,48.51 18.8,46.86 v22.23,46.86 22.86,47.5 35.81,47.5 39.75,43.56 39.75,42.55 40.26,42.04 v40.89,42.04
SDA  (via drill 0.38)
  Top 0.203: U2.5 17.95,47.28 19.18,48.51 R3.1
  Top 0.254: 19.18,48.51 20.45,48.51 v20.83,48.13 20.83,38.83 U19.5 22.99,33.27 23.37,32.89 23.37,31.38 U14.3 | v43.43,40.64 42.16,40.64 41.78,40.26 U3.9
  Bottom 0.254: v20.83,48.13 35.94,48.13 v43.43,40.64
TX  (via drill 0.38)
  Top 0.203: v67.82,34.04 69.6,34.04 U18.4
  Bottom 0.203: 19.56,28.45 17.78,28.45 U1.13
  Bottom 0.254: v67.82,34.04 25.53,34.04 25.15,34.04 24.77,34.04 20.32,29.59 20.32,29.21 19.56,28.45
U2RTS  (via drill 0.38)
  Top 0.254: U18.3 69.54,35.56 67.56,35.56 67.06,35.05 R42.2 67.86,32.22 v68.58,31.5
  Top 0.406: U18.3 U18.2
  Bottom 0.203: 18.03,16.26 18.54,16.26 U17.11
  Bottom 0.254: v68.58,31.5 69.09,31.5 72.64,27.94 72.64,24.89 70.48,22.73 70.48,8.13 63.37,1.02 24.13,1.02 18.54,6.6 15.88,6.6 14.1,8.38 14.1,13.08 17.27,16.26 18.03,16.26
VOFFSET  (via drill 0.38)
  Top 0.254: v23.75,20.32 23.62,20.07 23.24,20.07 22.26,21.04 R31.2 20.83,21.72 19.68,22.86 19.68,24.26 20.57,25.15 20.57,27.43 19.81,28.19 SJ1.2 | v28.83,21.97 27.65,21.97 R27.2
  Bottom 0.254: v23.75,20.32 27.18,20.32 v28.83,21.97
VOPSPLY  (via drill 0.38)
  Top 0.254: C24.1 51.18,16.76 52.45,18.03 | C22.1 42.71,16.34 v41.02,18.03 | C23.1 39.54,26.45 v38.99,25.91
  Top 0.406: U12.8 v41.02,18.03 52.45,18.03 53.53,18.03 | 53.53,18.03 U16.8 | 53.53,18.03 53.53,20 54.86,21.34 55.63,21.34 57.91,23.62 57.91,25.53 57.91,29.46 57.15,30.23 55.5,30.23 SJ2.2 | U11.8 38.54,25.46 v38.99,25.91
  Top 0.61: C18.1 58.55,26.16 57.91,25.53
  Bottom 0.406: v38.99,25.91 38.99,21.72 40.51,20.19 40.51,18.03 v41.02,18.03
VREF_33
  Top 0.254: SJ1.3 15.92,29.08 U9.2
  Top 0.61: C7.1 19.68,30.35 SJ1.3

## Text on the board
tPlace: This side to BeagleBoard
bPlace: GND | 24V | 24V | GND | Contact | GND | Contact | 0-10V | 0-10V | GND | GND | 24V (Cent +) | (AIN1) | (AIN0) | 4-20mA In | GPIO161 | GPIO159 | INPUTS | GND | (AIN3) | INPUTS | POWER IN | 24V | 4-20mA In | www.stackfoundry.com | GND | Copyright 2010 StackFoundry LLC | (AIN2) | SERIAL | D- | D+ | RS485 | GND | This Side Up | Beagleboard Hardhat | Isolated Relay | MAX: 150mA | GPIO162 | OUTPUTS | GPIO158 | GND | 4-20mA Out (D) | GND | 4-20mA Out (C) | GND | 0-10V Out (A) | GND | 0-10V Out (B) | Revision 1